# Altium PCB DB_Memory.PcbDoc (part 1 of 2)
Units mm, origin at the board's own origin, x right, y up, seen from the top; angles counter-clockwise.
Board outline 63.5 x 43.5 mm, 2 copper layers (Top Layer, Bottom Layer), stack 1.671 mm thick; 45 components, 30 nets, 135 pads, 49 vias.
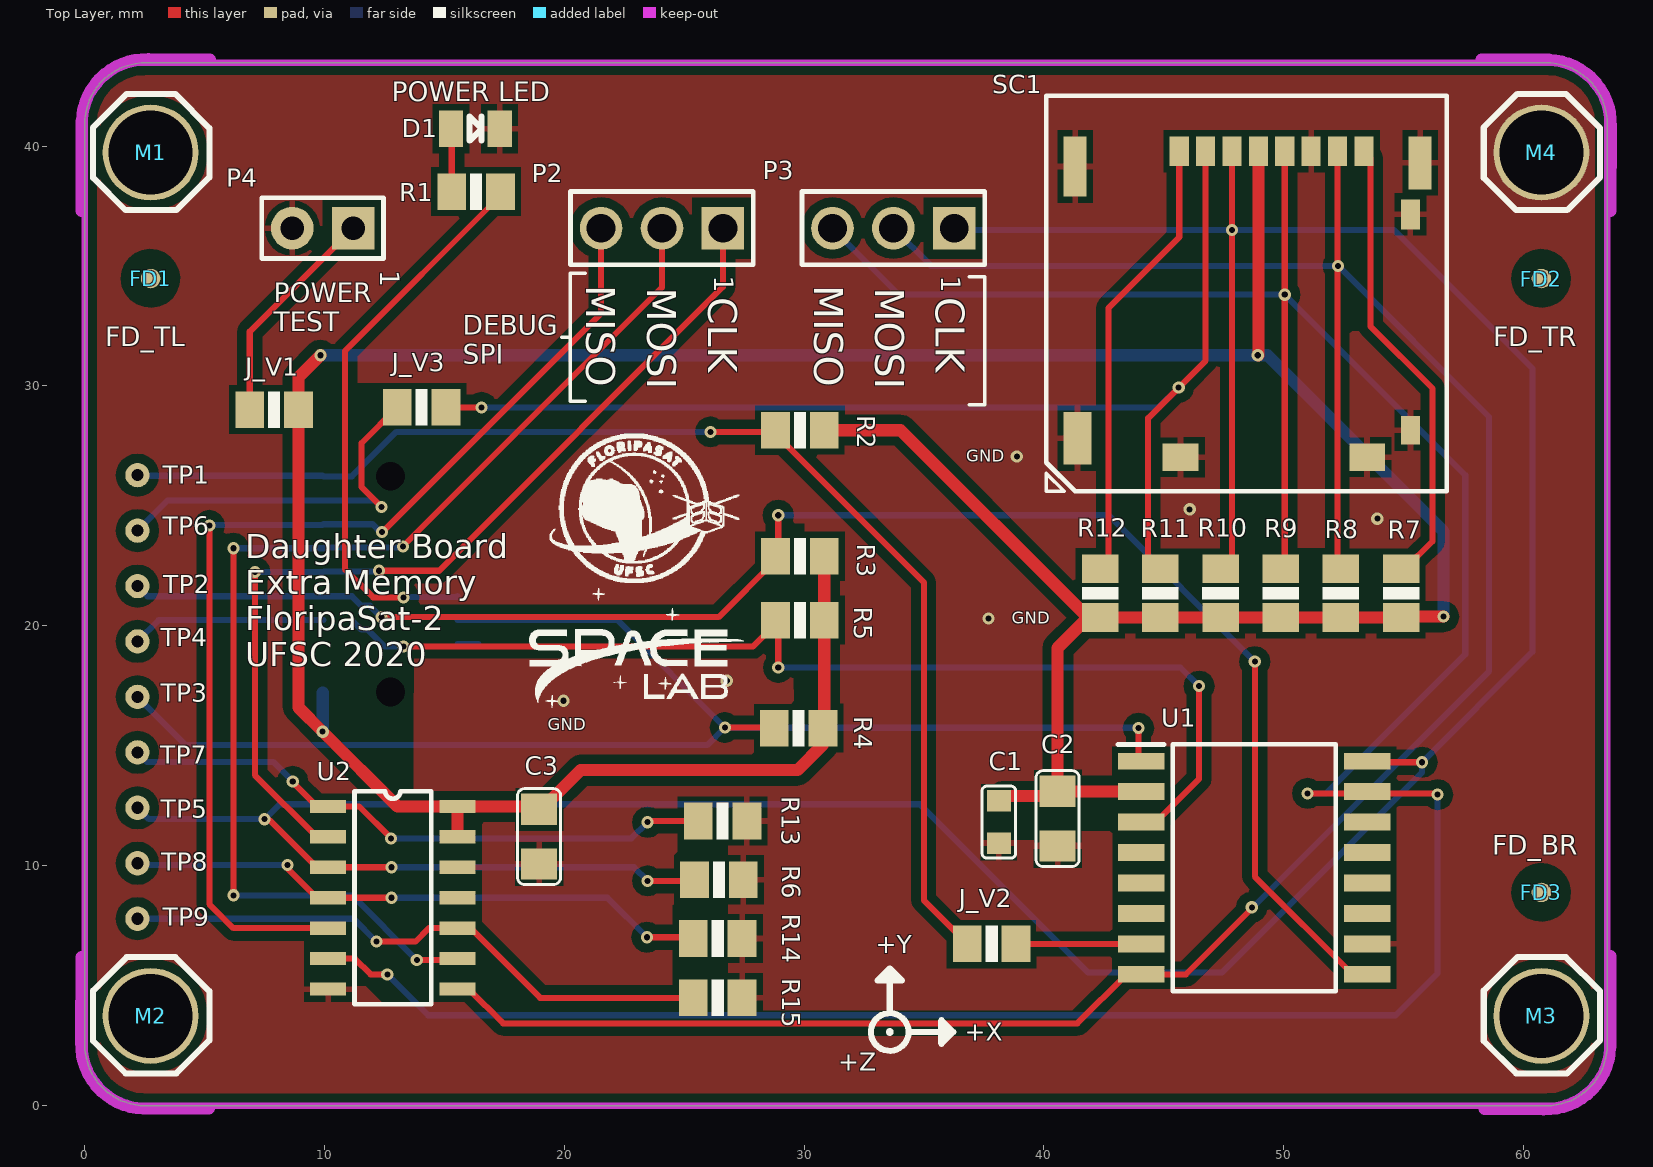
[diagram p0: Top Layer view]
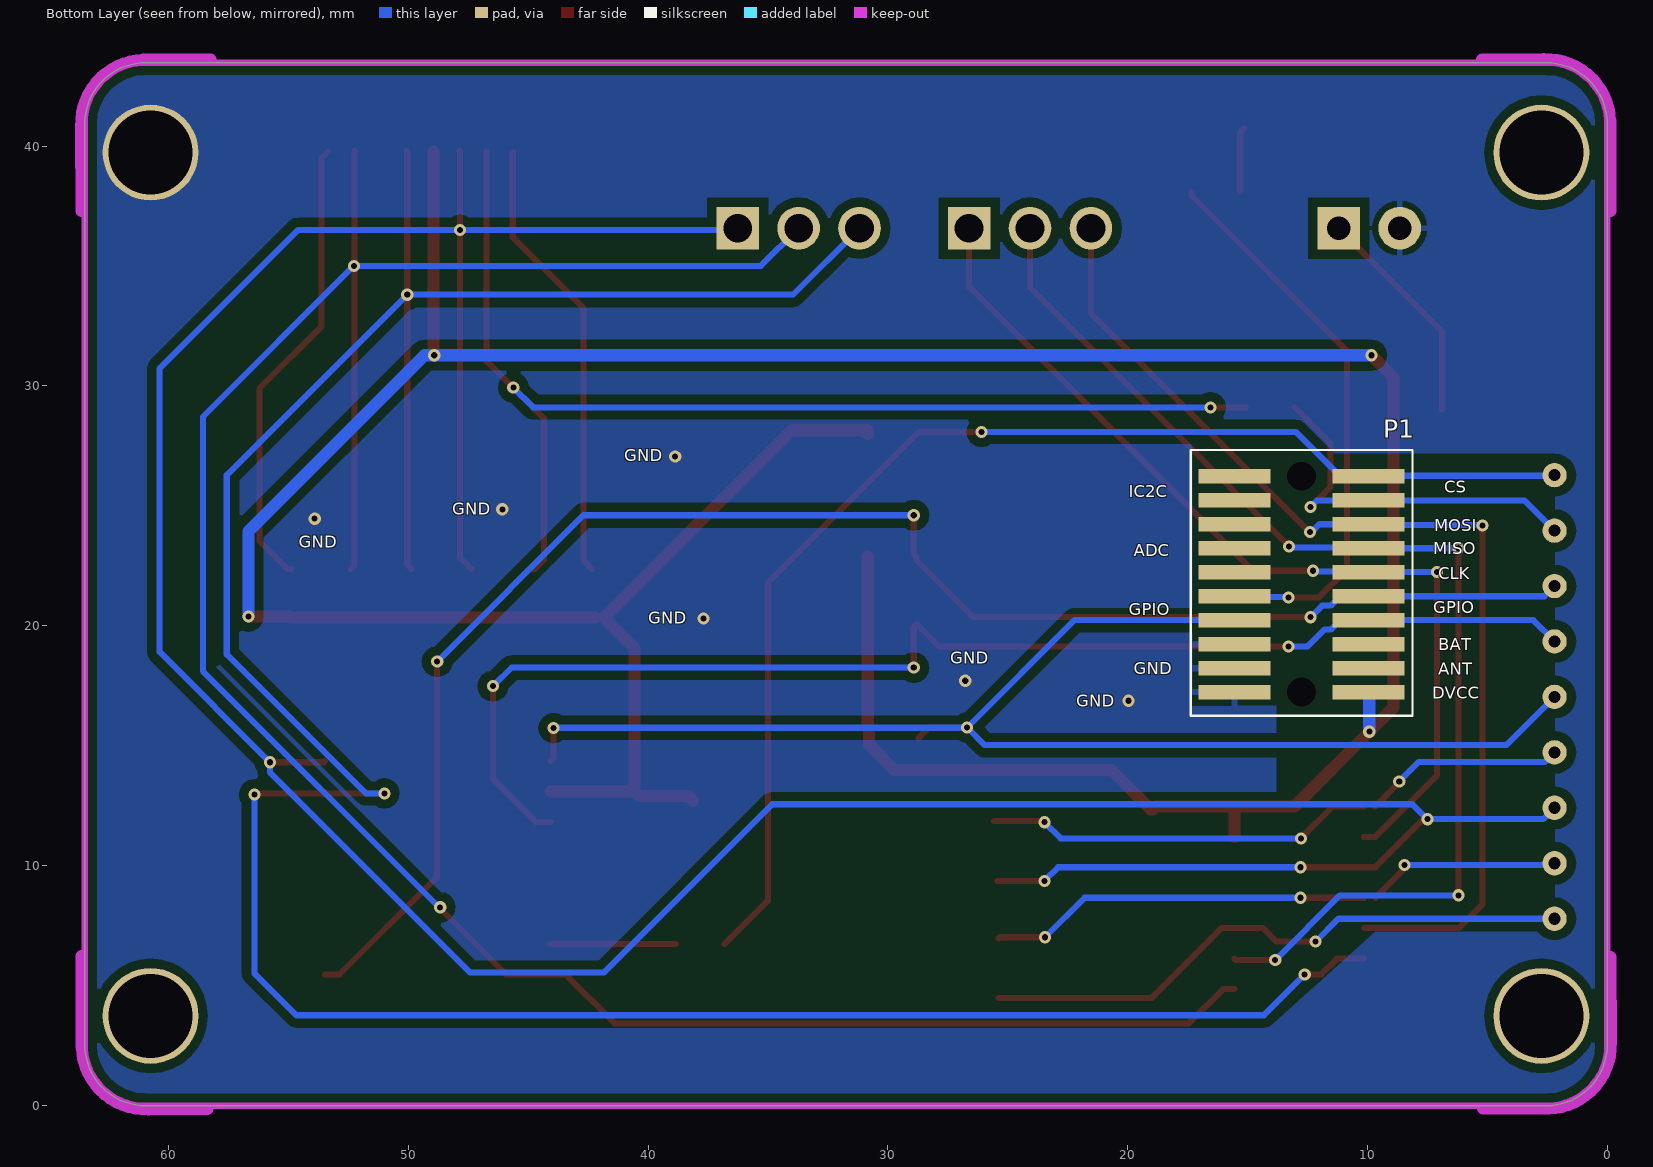
[diagram p1: Bottom Layer view, seen from below]
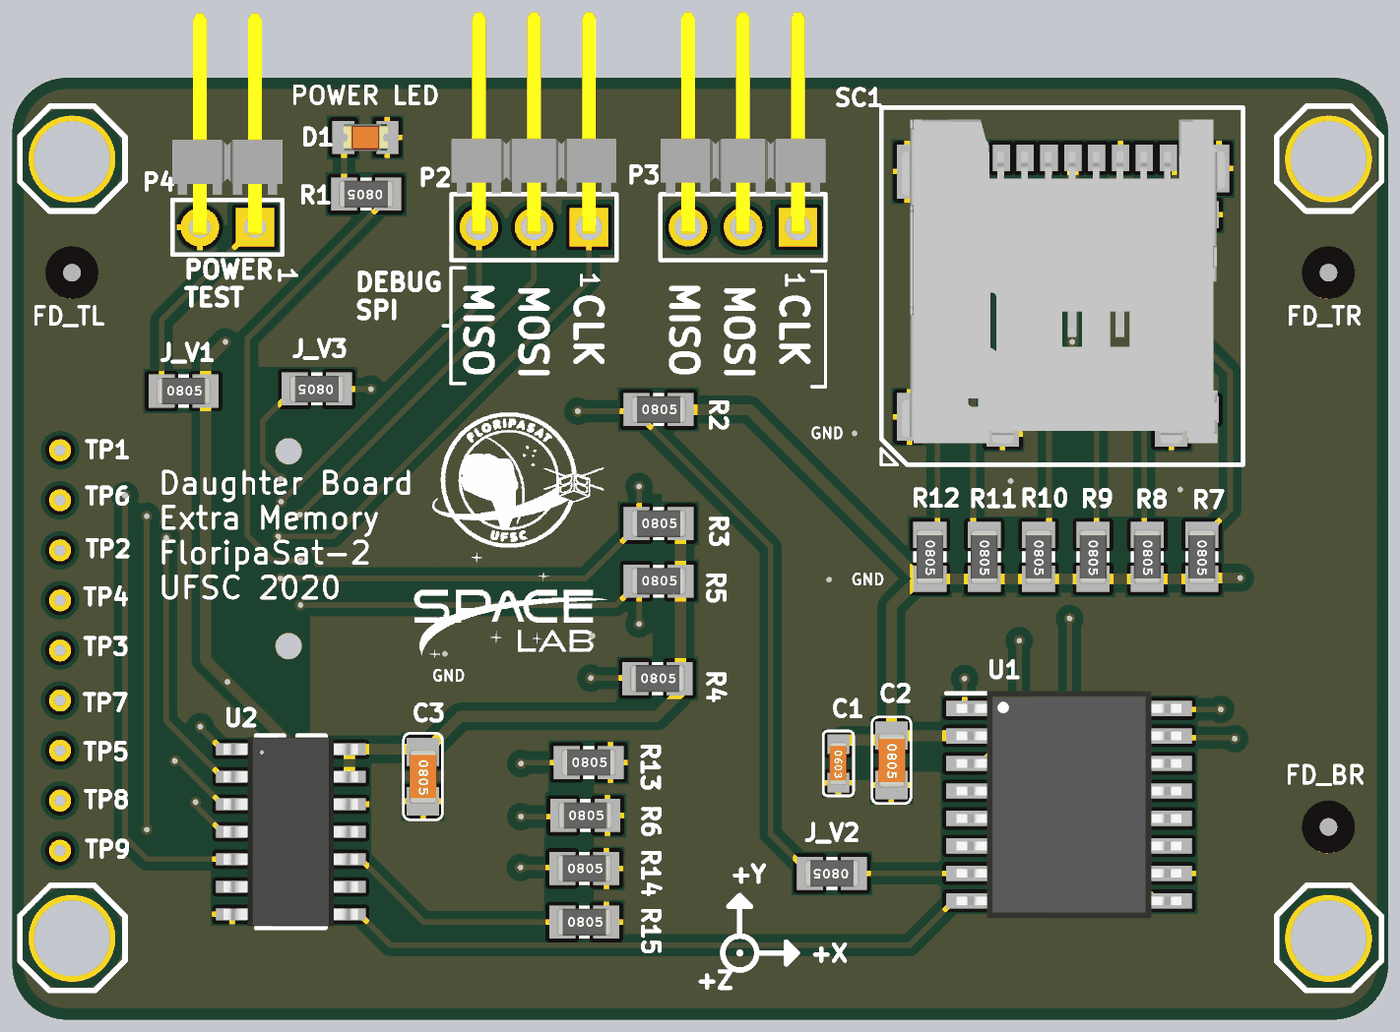
[diagram p2: 3D render of the assembled board from above, using the file's embedded part models]

## Layer stack, top to bottom
Top Solder: solder mask 0.0102, Solder Resist, Dk 3.5
Top Layer: signal copper 0.0356
Dielectric 1: dielectric 1.6, FR-4, Dk 4.8
Bottom Layer: signal copper 0.0356
Bottom Solder: solder mask 0.0102, Solder Resist, Dk 3.5

## Board outline
2.54,-0.025 cw(c2.54,2.515) 0,2.515 0,2.775 0,40.825 0,40.935 cw(c2.54,40.935) 2.54,43.475 2.65,43.475 60.7,43.475 60.96,43.475 cw(c60.96,40.935) 63.5,40.935 63.5,40.675 63.5,2.775 63.5,2.515 cw(c60.96,2.515) 60.96,-0.025

## Design rules (kind name [scope] priority, off if disabled: settings)
Clearance Clearance_1 [(ObjectKind = 'Pad') And (AsMM(X1) = 60.75) And (AsMM(Y1) = 39.75)] p1: gap=0.254 ignorepadtopadclearanceinfootprint=FALSE except(0: Arc-Hole Track-Hole SMDPad-Hole THPad-Hole Via-Hole Fill-Hole Poly-Hole Region-Hole Text-Hole)
Clearance Clearance_6 [InNet('GND')] p2: gap=0.381 ignorepadtopadclearanceinfootprint=FALSE except(0: Arc-Hole Track-Hole SMDPad-Hole THPad-Hole Via-Hole Fill-Hole Poly-Hole Region-Hole Text-Hole; 0.152: THPad-THPad; 0.178: Arc-SMDPad Arc-THPad Track-SMDPad Track-THPad SMDPad-SMDPad; 0.254: SMDPad-Fill SMDPad-Poly SMDPad-Region; 0.508: Arc-Arc Arc-Track Arc-Text Track-Track Track-Text SMDPad-Text Fill-Fill Fill-Poly Fill-Region Fill-Text Poly-Poly Poly-Region Poly-Text Region-Region Region-Text Text-Text)
Clearance [All] p3: gap=0.178 ignorepadtopadclearanceinfootprint=FALSE except(0: Arc-Hole Track-Hole SMDPad-Hole THPad-Hole Via-Hole Fill-Hole Poly-Hole Region-Hole Text-Hole)
DiffPairsRouting DiffPairsRouting_1 [InDifferentialPair('XT2')] p1: maxlimit=0.254 minlimit=0.254 mostfreqgap=0.254 toplayer_minwidth=0.254 toplayer_maxwidth=0.254 toplayer_prefwidth=0.254 bottomlayer_minwidth=0.254 bottomlayer_maxwidth=0.254 bottomlayer_prefwidth=0.254 maxuncoupledlength=12.7
DiffPairsRouting [All] p2: maxlimit=0.152 minlimit=0.152 mostfreqgap=0.152 toplayer_minwidth=0.457 toplayer_maxwidth=0.457 toplayer_prefwidth=0.457 bottomlayer_minwidth=0.457 bottomlayer_maxwidth=0.457 bottomlayer_prefwidth=0.457 maxuncoupledlength=12.7
HoleSize [All] p1: absolutevalues=TRUE maxlimit=5.08 minlimit=0.025 maxpercent=80.000 minpercent=20.000
MinimumSolderMaskSliver [All] p1: minsoldermaskwidth=0
PlaneConnect [InNetClass('power')] p1: planeconnectstyle=Direct reliefexpansion=0.508 reliefentries=4 reliefconductorwidth=0.254 reliefairgap=0.254
PlaneConnect PlaneConnect_1 [All] p2: planeconnectstyle=Relief reliefexpansion=0.508 reliefentries=4 reliefconductorwidth=0.254 reliefairgap=0.254
PolygonConnect PolygonConnect_GDN_Mechole [(ObjectKind = 'Pad') And (AsMM(X1) = 60.75) And (AsMM(Y1) = 39.725) And (Component = 'M4')] p1: connectstyle=Direct reliefconductorwidth=0.254 reliefentries=4 polygonreliefangle="90 Angle" airgapwidth=0.254
PolygonConnect PolygonConnect_GND_pads [(ObjectKind = 'Pad') And (Net = 'GND')] p2: connectstyle=Relief reliefconductorwidth=0.254 reliefentries=4 polygonreliefangle="90 Angle" airgapwidth=0.254
RoutingVias [All] p1: holewidth=0.254 width=0.508 viastyle="Through Hole" minholewidth=0.127 minwidth=0.254 maxholewidth=0.254 maxwidth=0.635
SilkToSilkClearance [All] p1: silktosilkclearance=0.127
SilkToSolderMaskClearance [IsPad] p1: minsilkscreentomaskgap=0 clearancetoexposedcopper=TRUE
SolderMaskExpansion [All] p1: expansion=0.178
Width Width_Power [InNetClass('Power')] p1: maxlimit=0.762 minlimit=0.508 preferedwidth=0.508
Width [All] p2: maxlimit=1.778 minlimit=0.127 preferedwidth=0.254
24 further rules are at their usual default settings.

## Classes and differential pairs
component class 0_Architecture: FD1 FD2 FD3 M1 M2 M3 M4
component class U_3_Communication_Buffers: C3 R13 R14 R15 TP7 TP8 TP9 U2
component class U_2_Non_Volatile_Memories: C1 C2 J_V2 J_V3 R2 R3 R4 R5 R6 R7 R8 R9 R10 R11 R12 SC1 TP1 TP2 TP3 TP4 TP5 TP6 U1
component class "OBDH 2.0 to DB_Memory interface connector": D1 J_V1 P1 P2 P3 P4 R1

## Components (designator, comment, footprint, x,y, rotation, side; value= is the part's Value field where it differs from the comment)
C1 "100nF/50V" C0603_MD 38.125,11.805 r270 top
C2 "4.7uF/25V" C0805_MD 40.575,11.95 r270 top
C3 "0.1uF/25V" C0805_MD 18.95,11.2 r270 top
D1 "Orange" 0805-LED 16.3,40.725 r0 top
FD1 "Fiducial" "FIDUCIAL 1.3MM" 2.75,34.475 r0 top
FD2 "Fiducial" "FIDUCIAL 1.3MM" 60.75,34.475 r0 top
FD3 "Fiducial" "FIDUCIAL 1.3MM" 60.75,8.872 r0 top
J_V1 "0R" 0805 7.899,29.007 r0 top
J_V2 "0R" 0805 37.825,6.725 r180 top
J_V3 "0R" 0805 14.05,29.1 r180 top
M1 "DB Mechanical Hole" "DB MECHANICAL HOLE" 2.75,39.725 r0 top
M2 "DB Mechanical Hole" "DB MECHANICAL HOLE" 2.75,3.725 r0 top
M3 "DB Mechanical Hole" "DB MECHANICAL HOLE" 60.75,3.725 r0 top
M4 "DB Mechanical Hole" "DB MECHANICAL HOLE" 60.75,39.725 r0 top
P1 "FSI-110-03-G-D-AD" "MATING FSI-110-03-G-D-AD" 12.75,21.725 r0 top
P2 "HEADER 3x" HEADER1X3 24.075,36.575 r270 top
P3 "HEADER 3x" HEADER1X3 33.725,36.575 r270 top
P4 "HEADER 2x" "HEADER 1X2" 9.925,36.575 r0 top
R1 "330R" 0805 16.325,38.1 r180 top
R2 "10k" 0805 29.825,28.15 r0 top
R3 "10k" 0805 29.825,22.887 r0 top
R4 "10k" 0805 29.775,15.725 r0 top
R5 "10k" 0805 29.825,20.231 r0 top
R6 "100k" 0805 26.45,9.4 r0 top
R7 "10k" 0805 54.9,21.35 r270 top
R8 "10k" 0805 52.39,21.35 r270 top
R9 "10k" 0805 49.88,21.35 r270 top
R10 "10k" 0805 47.37,21.35 r270 top
R11 "10k" 0805 44.86,21.35 r270 top
R12 "10k" 0805 42.35,21.35 r270 top
R13 "10k" 0805 26.6,11.85 r0 top
R14 "10k" 0805 26.4,6.95 r0 top
R15 "10k" 0805 26.4,4.475 r0 top
SC1 "MicroSD Card Connector" USD_CARD 48.5,33.4 r180 top
TP1 "TEST_POINT_2" TEST_POINT_2 2.2,26.275 r90 top
TP2 "TEST_POINT_2" TEST_POINT_2 2.2,21.65 r90 top
TP3 "TEST_POINT_2" TEST_POINT_2 2.2,17.025 r90 top
TP4 "TEST_POINT_2" TEST_POINT_2 2.2,19.337 r90 top
TP5 "TEST_POINT_2" TEST_POINT_2 2.2,12.4 r90 top
TP6 "TEST_POINT_2" TEST_POINT_2 2.2,23.962 r90 top
TP7 "TEST_POINT_2" TEST_POINT_2 2.2,14.712 r180 top
TP8 "TEST_POINT_2" TEST_POINT_2 2.2,10.087 r180 top
TP9 "TEST_POINT_2" TEST_POINT_2 2.2,7.775 r180 top
U1 "MT25QL01GBBB8ESF-0SIT" SOIC127P1032X265-16N 48.775,9.9 r0 top
U2 "SN74LVC125APWR" SN74LVC125APWR 12.85,8.65 r0 top

## Footprints (in the part's own frame and the unit in brackets; to place one, negate y for a bottom-side part, rotate by r counter-clockwise, add the part's x,y. Pads: shape width x height; smd on the part's side, far side on the other; paste and mask are expansions set on the pad)
0805 [mil]
  rect 47.24x60 smd: 1(-40,0) 2(40,0)
  silkscreen extent -10,-30 10,30, body extent -49,-24 49,25, height 31
0805-LED [mil]
  rect 40x60 smd: 1(-40.35,0) 2(39.65,0)
  silkscreen extent -10,-20 10,20, body extent -40,-25 40,25, height 43
C0603_MD [mm] "Chip Capacitor, Body 1.6x0.8mm, IPC Medium Density"
  rect 0.9x1 smd: 1(-0.889,0) 2(0.889,0)
  silkscreen extent -1.5,-0.7 1.5,0.7, body extent -1,-0.41 1,0.38, height 0.79
C0805_MD [mm] "Chip Capacitor, Body 2.0x1.3mm, IPC Medium Density"
  rect 1.3x1.5 smd: 1(-1.143,0) 2(1.143,0)
  silkscreen extent -2,-0.9 2,0.9, body extent -1.25,-0.61 1.25,0.64, height 0.79
"DB MECHANICAL HOLE" [mm]
  round 4 hole 3.5 mask+0: 0(0,0)
"FIDUCIAL 1.3MM" [mil]
  round 32 smd: 1(0,0)
  Top Layer pour cut-out: -48.23,-6.89 -45.31,17.58 -30.69,37.43 -8.18,47.47 16.35,45.09 36.52,30.91 47.05,8.63 45.22,-15.95 31.5,-36.42 31.5,-36.42 8.41,-46.85 -16.81,-44.45 -37.51,-29.85 -48.23,-6.89
  Top Layer pour cut-out: 0.19,48.23
HEADER1X3 [mil]
  rect 70x70 hole 47.24: 1(0,100)
  round 70 hole 47.24: 2(0,0) 3(0,-100)
  silkscreen extent -60,-150 60,150, body extent -391,-150 11,150, height 120
"HEADER 1X2" [mil]
  rect 70x70 hole 39: 1(50,0)
  round 70 hole 39: 2(-50,0)
  silkscreen extent -100,-50 100,50, body extent -100,-13 100,389, height 120
"MATING FSI-110-03-G-D-AD" [mm]
  rect 3x0.61 smd far side: 1(-2.8,-4.5) 2(2.8,-4.5) 3(-2.8,-3.5) 4(2.8,-3.5) 5(-2.8,-2.5) 6(2.8,-2.5) 7(-2.8,-1.5) 8(2.8,-1.5) 9(-2.8,-0.5) 10(2.8,-0.5) 11(-2.8,0.5) 12(2.8,0.5) 13(-2.8,1.5) 14(2.8,1.5) 15(-2.8,2.5) 16(2.8,2.5) 17(-2.8,3.5) 18(2.8,3.5) 19(-2.8,4.5) 20(2.8,4.5)
  round 0 hole 1.2: AT(0,-4.5) AT(0,4.5)
SN74LVC125APWR [mm]
  rect 1.5x0.55 smd: 1(-2.7,3.81) 2(-2.7,2.54) 3(-2.7,1.27) 4(-2.7,0) 5(-2.7,-1.27) 6(-2.7,-2.54) 7(-2.7,-3.81) 8(2.7,-3.81) 9(2.7,-2.54) 10(2.7,-1.27) 11(2.7,0) 12(2.7,1.27) 13(2.7,2.54) 14(2.7,3.81)
  silkscreen extent -1.6,-4.44 1.6,4.44, body extent -3.1,-4.37 3.1,4.37, height 1.76
SOIC127P1032X265-16N [mm]
  rect 1.925x0.7 smd: 1(-4.712,4.445) 2(-4.712,3.175) 3(-4.712,1.905) 4(-4.712,0.635) 5(-4.712,-0.635) 6(-4.712,-1.905) 7(-4.712,-3.175) 8(-4.712,-4.445) 9(4.712,-4.445) 10(4.712,-3.175) 11(4.712,-1.905) 12(4.712,-0.635) 13(4.712,0.635) 14(4.712,1.905) 15(4.712,3.175) 16(4.712,4.445)
  silkscreen extent -5.68,-5.15 3.4,5.15, body extent -5.19,-5.25 5.19,5.25, height 2.8
TEST_POINT_2 [mil]
  round 40 hole 20: 1(0,0)
USD_CARD [mm]
  rect 0.8x1.24 smd: 1(2.85,-6.378) 2(1.75,-6.378) 3(0.65,-6.378) 4(-0.45,-6.378) 5(-1.55,-6.378) 6(-2.65,-6.378) 7(-3.75,-6.378) 8(-4.85,-6.378) 10(-6.79,-3.748)
  rect 0.95x2.2 smd: 10(-7.195,-5.898)
  rect 0.8x1.2 smd: 10(-6.79,5.252)
  rect 1.5x1.15 smd: 10(-4.99,6.378) 10(2.79,6.378)
  rect 1.15x2.2 smd: 10(7.095,5.582)
  rect 0.95x2.5 smd: 10(7.195,-5.748)
  silkscreen extent -8.3,-8.7 8.39,7.8, body extent -7.49,-8.16 7.45,6.79, height 1.43

## Part data
C1: library part Cap_Cer_X7R_100nF_50V_0603, "CAP CER 100nF 50V 0603 10%", Capacitance=100pF, Case/Package=0201, Case Code (Metric)=0603, Dielectric=X7R, Manufacturer=Yageo, Manufacturer Part Number=CC0201KRX7R9BB101, Max Operating Temperature=125°C, Min Operating Temperature=-55°C, Package Quantity=1, Partnumber=C0603C104K5RAC3121, Supplier Part Number 1=311-1401-1-ND, Tolerance=10%, Voltage Rating=50V, Case Code (Imperial)=0201, ComponentLink1Description=https://www.digikey.com/product-detail/en/yageo/CC0201KRX7R9BB101/311-1401-1-ND/2833707, ComponentLink1URL=https://www.digikey.com/product-detail/en/yageo/CC0201KRX7R9BB101/311-1401-1-ND/2833707, ComponentLink2Description=https://br.mouser.com/ProductDetail/Yageo/CC0201KRX7R9BB101?qs=%2Fha2pyFaduiYipKOFrxfqt3%252B9aGSfhofiweIoBBppi5CkwQHqUahpQ%3D%3D, ComponentLink2URL=https://br.mouser.com/ProductDetail/Yageo/CC0201KRX7R9BB101?qs=%2Fha2pyFaduiYipKOFrxfqt3%252B9aGSfhofiweIoBBppi5CkwQHqUahpQ%3D%3D, ComponentLink3Description=http://www.yageo.com/documents/recent/UPY-GPHC_X7R_6.3V-to-50V_18.pdf?src-supplier=Digi-Key, ComponentLink3URL=http://www.yageo.com/documents/recent/UPY-GPHC_X7R_6.3V-to-50V_18.pdf?src-supplier=Digi-Key, ComponentLink4Description=http://www.yageo.com/documents/recent/UPY-GPHC_X7R_6.3V-to-50V_8.pdf?src-supplier=Avnet+Europe, ComponentLink4URL=http://www.yageo.com/documents/recent/UPY-GPHC_X7R_6.3V-to-50V_8.pdf?src-supplier=Avnet+Europe, ComponentLink5Description=http://www.yageo.com/documents/recent/UPY-GPHC_X7R_6.3V-to-50V_8.pdf?src-supplier=Avnet, ComponentLink5URL=http://www.yageo.com/documents/recent/UPY-GPHC_X7R_6.3V-to-50V_8.pdf?src-supplier=Avnet, ComponentLink6Description=http://www.mouser.com/ds/2/447/Yageo_UPY-GP_NP0_16V-to-50V_9-358835.pdf?src-supplier=Mouser, ComponentLink6URL=http://www.mouser.com/ds/2/447/Yageo_UPY-GP_NP0_16V-to-50V_9-358835.pdf?src-supplier=Mouser, Composition=Ceramic, Depth=0.3mm, Halogen Free="Halogen Free", Height=0.3mm, Lead Free="Lead Free", Length=0.6mm, Mount="Surface Mount", NCM=8532.24.10, Packaging="Tape and Reel", Pricing 1="1=0.1, 10=0.017, 100=0.0078, 500=0.00554, 1000=0.00436, 2500=0.00396, 5000=0.00364 (USD)", Pricing 2="1=0.1, 10=0.024, 100=0.011, 1000=0.009, 2500=0.006, 10000=0.006 (USD)", Radiation Hardening=No, Stock 1=203642, Stock 2=51204, Supplier 1=Digi-Key, Supplier 2=Mouser, Supplier Part Number 2=603-CC201KRX7R9BB101, Termination=SMD/SMT, Thickness=0.013inch, Voltage Rating (DC)=50V, Weight=6E-06oz, Width=0.012inch
C2: library part Cap_Cer_X7R_4.7uF_25V_0805, "CAP CER 4.7UF 25V 10% X7R 0805", Capacitance=4.7uF, Case/Package=0805, Case Code (Metric)=2012, Dielectric=X7R, Manufacturer="Taiyo Yuden", Manufacturer Part Number=TMK212AB7475KG-T, Max Operating Temperature=125°C, Min Operating Temperature=-55°C, Package Quantity=1, Partnumber=C0805C475K3RACAUTO, Supplier Part Number 1=587-2990-6-ND, Tolerance=10%, Voltage Rating=25V, Case Code (Imperial)=0805, ComponentLink1Description=https://www.digikey.com/product-detail/en/taiyo-yuden/TMK212AB7475KG-T/587-2990-2-ND/2714168, ComponentLink1URL=https://www.digikey.com/product-detail/en/taiyo-yuden/TMK212AB7475KG-T/587-2990-2-ND/2714168, ComponentLink2Description=https://br.mouser.com/ProductDetail/Taiyo-Yuden/TMK212AB7475KG-T?qs=%2Fha2pyFaduhOmvqoBXaf2AOtUPA8upoo0e72F1hCYb1lacT8UkHI0g%3D%3D, ComponentLink2URL=https://br.mouser.com/ProductDetail/Taiyo-Yuden/TMK212AB7475KG-T?qs=%2Fha2pyFaduhOmvqoBXaf2AOtUPA8upoo0e72F1hCYb1lacT8UkHI0g%3D%3D, ComponentLink3Description=https://www.yuden.co.jp/productdata/catalog/mlcc_all_e.pdf?src-supplier=Digi-Key, ComponentLink3URL=https://www.yuden.co.jp/productdata/catalog/mlcc_all_e.pdf?src-supplier=Digi-Key, ComponentLink4Description=http://www.yuden.co.jp/ut/product/category/capacitor/TMK212AB7475KG-T.pdf?src-supplier=Avnet, ComponentLink4URL=http://www.yuden.co.jp/ut/product/category/capacitor/TMK212AB7475KG-T.pdf?src-supplier=Avnet, ComponentLink5Description=http://www.farnell.com/datasheets/1481447.pdf?src-supplier=Element14, ComponentLink5URL=http://www.farnell.com/datasheets/1481447.pdf?src-supplier=Element14, ComponentLink6Description=http://www.onlinecomponents.com/productFiles/mf-TAI/461tmk212ab7475kg-t.pdf?src-supplier=Onlinecomponents.com, ComponentLink6URL=http://www.onlinecomponents.com/productFiles/mf-TAI/461tmk212ab7475kg-t.pdf?src-supplier=Onlinecomponents.com, Composition=Ceramic, Depth=1.25mm, Height=1.25mm, Length=2mm, Mount="Surface Mount", NCM=8532.24.10, Number of Pins=2, Packaging="Tape and Reel", Pricing 1="1=0.35, 10=0.243, 100=0.1376, 500=0.09716, 1000=0.08501 (USD)", Pricing 2="1=0.27, 10=0.124, 100=0.083, 500=0.074, 1000=0.065, 3000=0.054 (USD)", Radiation Hardening=No, REACH SVHC=Unknown, Stock 1=1594936, Stock 2=326053, Supplier 1=Digi-Key, Supplier 2=Mouser, Supplier Part Number 2=963-TMK212AB7475KG-T, Termination=SMD/SMT, Thickness=0.053inch, Voltage Rating (DC)=25V, Width=0.049inch
C3: library part Cap_Cer_X7R_0.1uF_25V_0805, "CAP CER 0.1UF 25V 10% X7R 0805", Capacitance=100nF, Case/Package=0805, Case Code (Metric)=2012, Dielectric=X7R, Insulation Resistance=100GR, Manufacturer=Yageo, Manufacturer Part Number=CC0805KRX7R8BB104, Max Operating Temperature=125°C, Min Operating Temperature=-55°C, Package Quantity=1, Supplier Part Number 1=311-1141-1-ND, Tolerance=10%, Voltage Rating=25V, Case Code (Imperial)=0805, ComponentLink1Description=http://www.yageo.com/documents/recent/UPY-GPHC_X7R_6.3V-to-50V_18.pdf?src-supplier=Digi-Key, ComponentLink1URL=http://www.yageo.com/documents/recent/UPY-GPHC_X7R_6.3V-to-50V_18.pdf?src-supplier=Digi-Key, ComponentLink2Description=http://www.farnell.com/datasheets/1489800.pdf?src-supplier=Element14, ComponentLink2URL=http://www.farnell.com/datasheets/1489800.pdf?src-supplier=Element14, ComponentLink3Description=http://www.yageo.com/documents/recent/UPY-GPHC_X7R_6.3V-to-50V_18.pdf?src-supplier=Digi-Key, ComponentLink3URL=http://www.yageo.com/documents/recent/UPY-GPHC_X7R_6.3V-to-50V_18.pdf?src-supplier=Digi-Key, ComponentLink4Description=http://www.farnell.com/datasheets/1489800.pdf?src-supplier=Element14, ComponentLink4URL=http://www.farnell.com/datasheets/1489800.pdf?src-supplier=Element14, ComponentLink5Description=http://www.farnell.com/datasheets/1850775.pdf?src-supplier=Element14, ComponentLink5URL=http://www.farnell.com/datasheets/1850775.pdf?src-supplier=Element14, ComponentLink6Description=https://www.verical.com/server-webapp/html/getDatasheet?partID=330244&src-supplier=Verical, ComponentLink6URL=https://www.verical.com/server-webapp/html/getDatasheet?partID=330244&src-supplier=Verical, ComponentLink7Description=http://www.yageo.com/documents/recent/UPY-GPHC_X7R_6.3V-to-50V_8.pdf?src-supplier=Avnet+Europe, ComponentLink7URL=http://www.yageo.com/documents/recent/UPY-GPHC_X7R_6.3V-to-50V_8.pdf?src-supplier=Avnet+Europe, ComponentLink8Description=http://www.farnell.com/datasheets/1784427.pdf?src-supplier=Element14, ComponentLink8URL=http://www.farnell.com/datasheets/1784427.pdf?src-supplier=Element14, ComponentLink9Description=http://www.farnell.com/datasheets/70765.pdf?src-supplier=Element14, ComponentLink9URL=http://www.farnell.com/datasheets/70765.pdf?src-supplier=Element14, Composition=Ceramic, Depth=1.25mm, Halogen Free="Halogen Free", Height=0.85mm, Lead Free="Lead Free", Length=2mm, Material=Ceramic, Mount="Surface Mount", NCM=8532.24.10, Number of Pins=2, Packaging="Tape and Reel", Partnumber=CC0805KRX7R8BB104, Pricing 1="1=0.14, 10=0.097, 100=0.0458, 500=0.0321, 1000=0.02658 (USD)", Pricing 2="1=0.11, 10=0.08, 100=0.03, 1000=0.025, 4000=0.019, 8000=0.018, 24000=0.015, 48000=0.014, 100000=0.013 (USD)", Radiation Hardening=No, REACH SVHC="No SVHC", Stock 1=243958, Stock 2=131050, Supplier 1=Digi-Key, Supplier 2=Mouser, Supplier Part Number 2=603-CC805KRX7R8BB104, Termination=SMD/SMT, Thickness=0.033inch, Voltage Rating (DC)=25V, Width=0.049inch
D1: library part LED/O_0802, "SMD Orange LED", Case/Package=0805, Case Code (Metric)=2012, Forward Current=30mA, Forward Voltage=2V, Lens Color=Colorless, Manufacturer="Vishay Lite-On", Manufacturer Part Number=LTST-C170KFKT, Max Operating Temperature=85°C, Min Operating Temperature=-55°C, Package Quantity=1, Power Dissipation=75mW, Reverse Voltage=5V, Supplier Part Number 1=160-1413-1-ND, Test Current=20mA, Case Code (Imperial)=0805, Color=Orange, ComponentLink1Description=https://www.digikey.com/product-detail/en/lite-on-inc/LTST-C170KFKT/160-1413-1-ND/386774, ComponentLink1URL=https://www.digikey.com/product-detail/en/lite-on-inc/LTST-C170KFKT/160-1413-1-ND/386774, ComponentLink2Description=https://br.mouser.com/ProductDetail/Lite-On/LTST-C170KFKT?qs=%2Fha2pyFadugHsX7bdQzWjMrioqtf8F%2FEFUVxYkqdVx%252BrRWuVMVludQ%3D%3D, ComponentLink2URL=https://br.mouser.com/ProductDetail/Lite-On/LTST-C170KFKT?qs=%2Fha2pyFadugHsX7bdQzWjMrioqtf8F%2FEFUVxYkqdVx%252BrRWuVMVludQ%3D%3D, ComponentLink3Description=https://www.verical.com/server-webapp/html/getDatasheet?partID=158266&src-supplier=Verical, ComponentLink3URL=https://www.verical.com/server-webapp/html/getDatasheet?partID=158266&src-supplier=Verical, ComponentLink4Description=http://optoelectronics.liteon.com/upload/download/DS-22-99-0185/LTST-C170KFKT.pdf?src-supplier=Digi-Key, ComponentLink4URL=http://optoelectronics.liteon.com/upload/download/DS-22-99-0185/LTST-C170KFKT.pdf?src-supplier=Digi-Key, ComponentLink5Description=http://www1.futureelectronics.com/doc/LITE-ON/LTST-C170KFKT.pdf?src-supplier=Future+Electronics, ComponentLink5URL=http://www1.futureelectronics.com/doc/LITE-ON/LTST-C170KFKT.pdf?src-supplier=Future+Electronics, ComponentLink6Description=http://www.mouser.com/ds/2/239/Lite-On-LTST-C170KFKT-187690.pdf?src-supplier=Mouser, ComponentLink6URL=http://www.mouser.com/ds/2/239/Lite-On-LTST-C170KFKT-187690.pdf?src-supplier=Mouser, Depth=1.6mm, Dominant Wavelength=605nm, Height=1.1mm, Illumination Color=Orange, Lead Free="Lead Free", Length=3.2mm, Lens Style=Diffused,Colorless,Rectangular,Clear, Lens Transparency=Clear, Luminous Intensity=60mcd, Mount="Surface Mount", NCM=8541.40.21, Number of Elements=1, Number of LEDs=1, Number of Pins=2, Packaging="Tape and Reel", Partnumber=LTST-C170KFKT, Power Rating=75mW, Pricing 1="1=0.28, 10=0.204, 100=0.0968, 500=0.0645, 1000=0.05053 (USD)", Pricing 2="1=0.28, 10=0.15, 100=0.07, 1000=0.051, 3000=0.043, 9000=0.039, 24000=0.035, 45000=0.032, 99000=0.03 (USD)", Radiation Hardening=No, Stock 1=5261, Stock 2=0, Supplier 1=Digi-Key, Supplier 2=Mouser, Supplier Part Number 2=859-LTST-C170KFKT, Viewing Angle=130°, Wavelength=611nm, Width=1.25mm
FD1 FD2 FD3: "Fiducial for DB board variants"
J_V1 J_V2 J_V3: library part RC0805JR-070RL, "RES 0R OHM 1/8W JUMPER 0805", Case/Package=0805, Case Code (Metric)=2012, Manufacturer=Yageo, Max Operating Temperature=155°C, Min Operating Temperature=-55°C, Partnumber=CRCW08050000Z0EA, Power Rating=125mW, Resistance=0mR, Supplier Part Number 1=311-0.0ARCT-ND, Temperature Coefficient=200ppm/°C, Tolerance=5%, Voltage Rating=150V, Case Code (Imperial)=0805, ComponentLink1Description=http://www.farnell.com/datasheets/2167052.pdf?src-supplier=Element14, ComponentLink1URL=http://www.farnell.com/datasheets/2167052.pdf?src-supplier=Element14, ComponentLink2Description=http://documents.rs-components.com/techlib://itc_doclist_GB.htm?stockno=6185129&src-supplier=RSComponents, ComponentLink2URL=http://documents.rs-components.com/techlib://itc_doclist_GB.htm?stockno=6185129&src-supplier=RSComponents, ComponentLink3Description=https://www.verical.com/server-webapp/html/getDatasheet?partID=330685&src-supplier=Verical, ComponentLink3URL=https://www.verical.com/server-webapp/html/getDatasheet?partID=330685&src-supplier=Verical, Composition="Thick Film", Contact Plating=Tin,Matte, Depth=1.25mm, Height=0.5mm, Lead Free="Lead Free", Length=2mm, Manufacturer Part Number=RC0805JR-070RL, Military Standard=Not, NCM=8533.21.20, Number of Pins=2, Packaging="Tape and Reel", Pricing 1="1=0.1, 10=0.035, 25=0.0248, 50=0.019, 100=0.014, 250=0.01072, 500=0.00856, 1000=0.00631 (USD)", Pricing 2="1=0.1, 10=0.005, 100=0.005, 1000=0.005, 5000=0.004, 10000=0.004 (USD)", Radiation Hardening=No, REACH SVHC=Unknown, Stock 1=10579520, Stock 2=658275, Supplier 1=Digi-Key, Supplier 2=Mouser, Supplier Part Number 2=603-RC0805JR-070RL, Termination=SMD/SMT, Voltage Rating (DC)=150V, Width=1.25mm
M1 M2 M3 M4: "Mechanical Hole for DB board variants"
P1: "CONN STACKING 20POS SMD GOLD", Manufacturer=Samtec, Supplier Part Number 1=SAM9412-ND, ComponentLink1Description=https://www.digikey.com/product-detail/en/samtec-inc/FSI-110-03-G-D-AD/SAM9412-ND/6678149, ComponentLink1URL=https://www.digikey.com/product-detail/en/samtec-inc/FSI-110-03-G-D-AD/SAM9412-ND/6678149, ComponentLink2Description=https://br.mouser.com/ProductDetail/Samtec/FSI-110-03-G-D-AD?qs=sGAEpiMZZMvffgRu4KC1RxM6nKwEP14AvPoIU%2FGiIRnIunfAN0MvNQ%3D%3D, ComponentLink2URL=https://br.mouser.com/ProductDetail/Samtec/FSI-110-03-G-D-AD?qs=sGAEpiMZZMvffgRu4KC1RxM6nKwEP14AvPoIU%2FGiIRnIunfAN0MvNQ%3D%3D, ComponentLink3Description=http://www.samtec.com/ftppub/pdf/FSI_03.PDF?src-supplier=Avnet+Europe, ComponentLink3URL=http://www.samtec.com/ftppub/pdf/FSI_03.PDF?src-supplier=Avnet+Europe, Contact Material=Copper, Contact Plating=Gold, Gender=Male, Manufacturer Part Number=FSI-110-03-G-D-AD, Mount="Surface Mount", Number of Contacts=20, Number of Rows=2, Partnumber=FSI-110-03-G-D-AD, Pitch=1mm, Pricing 1="1=6.6, 10=6.325, 25=5.7752, 50=5.5, 100=5.225, 250=4.675, 500=4.4, 1000=3.85, 2500=3.6575 (USD)", Pricing 2="1=6.59, 10=5.5, 100=4.68, 250=4.17, 500=3.84, 1000=3.6 (USD)", Radiation Hardening=No, REACH SVHC="No SVHC", Stock 1=100, Stock 2=50, Supplier 1=Digi-Key, Supplier 2=Mouser, Supplier Part Number 2=200-FSI11003GDAD, Termination=Solder
P2 P3: "Conn Unshrouded Header HDR 3 POS 2.54mm Solder RA Thru-Hole Automotive Bulk", Color=Black, Manufacturer=Samtec, Manufacturer Part Number=TSW-103-08-G-S-RA, Max Current Rating=7.6A, Max Operating Temperature=125°C, Max Voltage Rating (AC)=450V, Min Operating Temperature=-55°C, Package Quantity=1, Supplier Part Number 1=SAM1039-03-ND, ComponentLink1Description=http://www.samtec.com/ftppub/pdf/htsw_th.pdf?src-supplier=Avnet+Europe, ComponentLink1URL=http://www.samtec.com/ftppub/pdf/htsw_th.pdf?src-supplier=Avnet+Europe, ComponentLink2Description=http://www.samtec.com/ftppub/pdf/htsw_th.pdf?src-supplier=Avnet, ComponentLink2URL=http://www.samtec.com/ftppub/pdf/htsw_th.pdf?src-supplier=Avnet, ComponentLink3Description=http://suddendocs.samtec.com/prints/tsw-xxx-xx-x-x-xx-xxx-footprint.pdf?src-supplier=Digi-Key, ComponentLink3URL=http://suddendocs.samtec.com/prints/tsw-xxx-xx-x-x-xx-xxx-footprint.pdf?src-supplier=Digi-Key, ComponentLink4Description=https://www.digikey.com/product-detail/en/samtec-inc/TSW-103-08-G-S-RA/SAM1039-03-ND/1101821, ComponentLink4URL=https://www.digikey.com/product-detail/en/samtec-inc/TSW-103-08-G-S-RA/SAM1039-03-ND/1101821, ComponentLink5Description=https://br.mouser.com/ProductDetail/Samtec/TSW-103-08-G-S-RA?qs=sGAEpiMZZMs%252BGHln7q6pm1g2HIpDMMemHovqpYNR5zQ9xV6Y7S0zpg%3D%3D, ComponentLink5URL=https://br.mouser.com/ProductDetail/Samtec/TSW-103-08-G-S-RA?qs=sGAEpiMZZMs%252BGHln7q6pm1g2HIpDMMemHovqpYNR5zQ9xV6Y7S0zpg%3D%3D, Connector Type="Male Pin", Contact Material=Bronze, Contact Mating Length=0.23inch, Contact Plating=Gold, Depth=9.9mm, Gender=Male, Housing Color=Black, Housing Material=Polyester, Lead Free="Lead Free", Length=7.62mm, Number of Contacts=3, Number of Positions=3, Number of Rows=1, Orientation="Right Angle", Packaging=Bulk, Pitch=2.54mm, Pricing 1="1=0.43, 10=0.403, 25=0.3456, 50=0.2938, 100=0.2822, 250=0.25344, 500=0.24192 (USD)", Pricing 2="1=0.44, 10=0.303, 100=0.249, 1000=0.208, 2500=0.178, 10000=0.16 (USD)", Radiation Hardening=No, REACH SVHC="No SVHC", Stock 1=2099, Stock 2=1859, Supplier 1=Digi-Key, Supplier 2=Mouser, Supplier Part Number 2=200-TSW10308GSRA, Termination=Solder, Width=2.54mm
P4: "Conn Unshrouded Header HDR 2 POS 2.54mm Solder RA Thru-Hole Automotive Bulk", Color=Black, Manufacturer=Samtec, Manufacturer Part Number=TSW-102-08-G-S-RA, Max Current Rating=7.6A, Max Operating Temperature=125°C, Max Voltage Rating (AC)=450V, Min Operating Temperature=-55°C, Package Quantity=1, Supplier Part Number 1=SAM1039-02-ND, ComponentLink1Description=http://www.samtec.com/ftppub/pdf/htsw_th.pdf?src-supplier=Avnet, ComponentLink1URL=http://www.samtec.com/ftppub/pdf/htsw_th.pdf?src-supplier=Avnet, ComponentLink2Description=http://suddendocs.samtec.com/prints/tsw-xxx-xx-x-x-xx-xxx-footprint.pdf?src-supplier=Digi-Key, ComponentLink2URL=http://suddendocs.samtec.com/prints/tsw-xxx-xx-x-x-xx-xxx-footprint.pdf?src-supplier=Digi-Key, ComponentLink3Description=https://www.digikey.com/product-detail/en/samtec-inc/TSW-102-08-G-S-RA/SAM1039-02-ND/1101822, ComponentLink3URL=https://www.digikey.com/product-detail/en/samtec-inc/TSW-102-08-G-S-RA/SAM1039-02-ND/1101822, ComponentLink4Description=https://br.mouser.com/ProductDetail/Samtec/TSW-102-08-G-S-RA?qs=sGAEpiMZZMs%252BGHln7q6pm8Vn94ktop%2FJ1uezLg%252BX1dFCcXJp94NfRw%3D%3D, ComponentLink4URL=https://br.mouser.com/ProductDetail/Samtec/TSW-102-08-G-S-RA?qs=sGAEpiMZZMs%252BGHln7q6pm8Vn94ktop%2FJ1uezLg%252BX1dFCcXJp94NfRw%3D%3D, Connector Type="Male Pin", Contact Material=Bronze, Contact Mating Length=0.23inch, Contact Plating=Gold, Depth=9.9mm, Gender=Male, Housing Color=Black, Housing Material=Polyester, Lead Free="Lead Free", Length=5.08mm, Number of Contacts=2, Number of Positions=2, Number of Rows=1, Orientation="Right Angle", Packaging=Bulk, Pitch=2.54mm, Pricing 1="1=0.28, 10=0.269, 25=0.2304, 50=0.1958, 100=0.1882, 250=0.16896, 500=0.16128 (USD)", Pricing 2="1=0.29, 10=0.203, 100=0.167, 1000=0.14, 2500=0.119, 10000=0.108 (USD)", Radiation Hardening=No, REACH SVHC="No SVHC", Stock 1=681, Stock 2=90, Supplier 1=Digi-Key, Supplier 2=Mouser, Supplier Part Number 2=200-TSW10208GSRA, Termination=Solder, Width=2.54mm
R1: library part R330R_1%_1/4W_0805, "RES 330R OHM 1/4W 1% 0805", Case/Package=0805, Case Code (Metric)=2012, Manufacturer="KOA Speer", Manufacturer Part Number=RK73H2ATTD3300F, Max Operating Temperature=155°C, Min Operating Temperature=-55°C, Package Quantity=5000, Partnumber=RC0805FR-07330RL, Power Rating=125mW, Supplier Part Number 1=2019-RK73H2ATTD3300FCT-ND, Temperature Coefficient=100ppm/°C, Tolerance=1%, Voltage Rating=150V, Case Code (Imperial)=0805, ComponentLink1Description=https://www.digikey.com/product-detail/en/koa-speer-electronics-inc/RK73H2ATTD3300F/2019-RK73H2ATTD3300FCT-ND/10235463, ComponentLink1URL=https://www.digikey.com/product-detail/en/koa-speer-electronics-inc/RK73H2ATTD3300F/2019-RK73H2ATTD3300FCT-ND/10235463, ComponentLink2Description=https://br.mouser.com/ProductDetail/KOA-Speer/RK73H2ATTD3300F?qs=%2Fha2pyFadugxRkEvlrt8CF%252BQdweyO24kpRel1WKIEPxDUp0ygGBU5A%3D%3D, ComponentLink2URL=https://br.mouser.com/ProductDetail/KOA-Speer/RK73H2ATTD3300F?qs=%2Fha2pyFadugxRkEvlrt8CF%252BQdweyO24kpRel1WKIEPxDUp0ygGBU5A%3D%3D, ComponentLink3Description=http://www.koaspeer.com/catimages/Products/RK73H/RK73H.pdf?src-supplier=Mouser, ComponentLink3URL=http://www.koaspeer.com/catimages/Products/RK73H/RK73H.pdf?src-supplier=Mouser, ComponentLink4Description=http://www.farnell.com/datasheets/1832268.pdf?src-supplier=Element14, ComponentLink4URL=http://www.farnell.com/datasheets/1832268.pdf?src-supplier=Element14, Composition="Thick Film", Depth=1.25mm, Height=0.5mm, Lead Free="Lead Free", Length=2mm, Military Standard=Not, NCM=8533.21.20, Packaging="Tape and Reel", Pricing 1="1=0.1, 10=0.033, 100=0.0136, 1000=0.00612, 2500=0.00531 (USD)", Pricing 2="1=0.1, 10=0.033, 100=0.013, 1000=0.005, 5000=0.005, 10000=0.004 (USD)", REACH SVHC=Unknown, Resistance=330R, Stock 1=55895, Stock 2=0, Supplier 1=Digi-Key, Supplier 2=Mouser, Supplier Part Number 2=660-RK73H2ATTD3300F, Termination=SMD/SMT, Width=1.25mm
R2 R3 R4 R5 R7 R8 R9 R10 R11 R12 R13 R14 R15: library part R10k_1%_1/8W_0805, "RES 10K OHM 1/8W 1%  0805", Case/Package=0805, Case Code (Metric)=2012, Manufacturer=Vishay, Manufacturer Part Number=CRCW080510K0FKEA, Max Operating Temperature=155°C, Min Operating Temperature=-55°C, Package Quantity=5000, Power Rating=125mW, Resistance=10kR, Supplier Part Number 1=541-10.0KCCT-ND, Temperature Coefficient=100ppm/°C, Tolerance=1%, Voltage Rating=150V, Case Code (Imperial)=0805, ComponentLink1Description=https://www.digikey.com/product-detail/en/vishay-dale/CRCW080510K0FKEA/541-10-0KCCT-ND/1180897, ComponentLink1URL=https://www.digikey.com/product-detail/en/vishay-dale/CRCW080510K0FKEA/541-10-0KCCT-ND/1180897, ComponentLink2Description=https://br.mouser.com/ProductDetail/Vishay-Dale/CRCW080510K0FKEA?qs=sGAEpiMZZMu61qfTUdNhG2DpbjADlD3GOIdKSeOTyFU%3D, ComponentLink2URL=https://br.mouser.com/ProductDetail/Vishay-Dale/CRCW080510K0FKEA?qs=sGAEpiMZZMu61qfTUdNhG2DpbjADlD3GOIdKSeOTyFU%3D, ComponentLink3Description=http://www.mouser.com/ds/2/427/dcrcwe3-109170.pdf?src-supplier=Mouser, ComponentLink3URL=http://www.mouser.com/ds/2/427/dcrcwe3-109170.pdf?src-supplier=Mouser, ComponentLink4Description=http://uk.rs-online.com/webdocs/0d98/0900766b80d98b26.pdf?src-supplier=RSComponents, ComponentLink4URL=http://uk.rs-online.com/webdocs/0d98/0900766b80d98b26.pdf?src-supplier=RSComponents, ComponentLink5Description=http://www.alliedelec.com/m/d/0c934d6939ccefa68dbe0b96d821c8cf.pdf?src-supplier=Allied+Electronics, ComponentLink5URL=http://www.alliedelec.com/m/d/0c934d6939ccefa68dbe0b96d821c8cf.pdf?src-supplier=Allied+Electronics, ComponentLink6Description=http://www.vishay.com/docs/20035/dcrcwe3.pdf?src-supplier=Avnet+Asia, ComponentLink6URL=http://www.vishay.com/docs/20035/dcrcwe3.pdf?src-supplier=Avnet+Asia, ComponentLink7Description=http://www.vishay.com/docs/20035/dcrcwe3.pdf?src-supplier=Avnet+Europe, ComponentLink7URL=http://www.vishay.com/docs/20035/dcrcwe3.pdf?src-supplier=Avnet+Europe, ComponentLink8Description=http://www.farnell.com/datasheets/2310790.pdf?src-supplier=Element14, ComponentLink8URL=http://www.farnell.com/datasheets/2310790.pdf?src-supplier=Element14, ComponentLink9Description=http://www.vishay.com/docs/20035/dcrcwe3.pdf?src-supplier=Avnet, ComponentLink9URL=http://www.vishay.com/docs/20035/dcrcwe3.pdf?src-supplier=Avnet, ComponentLink10Description=http://www.vishay.com/docs/20035/dcrcwe3.pdf?src-supplier=Future+Electronics, ComponentLink10URL=http://www.vishay.com/docs/20035/dcrcwe3.pdf?src-supplier=Future+Electronics, Composition="Thick Film", Contact Plating=Tin, Depth=1.25mm, Height=0.45mm, Lead Free="Lead Free", Length=2mm, Military Standard=Not, NCM=8533.21.20, Packaging="Tape and Reel", Partnumber=CRCW080510K0FKEA, Pricing 1="1=0.1, 10=0.062, 100=0.0254, 1000=0.01142, 2500=0.00991 (USD)", Pricing 2="1=0.1, 10=0.062, 100=0.025, 1000=0.01, 5000=0.007, 10000=0.006 (USD)", Radiation Hardening=No, REACH SVHC=Unknown, Stock 1=1478098, Stock 2=157494, Supplier 1=Digi-Key, Supplier 2=Mouser, Supplier Part Number 2=71-CRCW0805-10K-E3, Termination=SMD/SMT, Voltage Rating (DC)=150V, Weight=0.000194oz, Width=1.25mm
R6: library part R100k_1%_1/8W_0805, "RES 100K OHM 1/8W 1% 0805", Case/Package=0805, Case Code (Metric)=2012, Manufacturer=Yageo, Manufacturer Part Number=RC0805FR-07100KL, Max Operating Temperature=155°C, Max Power Dissipation=125mW, Min Operating Temperature=-55°C, Package Quantity=1, Partnumber=AC0805FR-13100KL, Resistance=100kR, Supplier Part Number 1=311-100KCRCT-ND, Temperature Coefficient=100ppm/°C, Tolerance=1%, Voltage Rating=150V, Case Code (Imperial)=0805, ComponentLink1Description=https://www.digikey.com/product-detail/en/yageo/RC0805FR-07100KL/311-100KCRCT-ND/730491, ComponentLink1URL=https://www.digikey.com/product-detail/en/yageo/RC0805FR-07100KL/311-100KCRCT-ND/730491, ComponentLink2Description=https://br.mouser.com/ProductDetail/Yageo/RC0805FR-07100KL?qs=%2Fha2pyFadugqH4HCO4lefXR2vnSIcQedeLFD%252BIWbuSwm%252BtiKkObUBg%3D%3D, ComponentLink2URL=https://br.mouser.com/ProductDetail/Yageo/RC0805FR-07100KL?qs=%2Fha2pyFadugqH4HCO4lefXR2vnSIcQedeLFD%252BIWbuSwm%252BtiKkObUBg%3D%3D, ComponentLink3Description=http://www.yageo.com/documents/recent/PYu-RC_Group_51_RoHS_L_10.pdf?src-supplier=Digi-Key, ComponentLink3URL=http://www.yageo.com/documents/recent/PYu-RC_Group_51_RoHS_L_10.pdf?src-supplier=Digi-Key, ComponentLink4Description=http://www.yageo.com/documents/recent/PYu-RC_Group_51_RoHS_L_9.pdf?src-supplier=Mouser, ComponentLink4URL=http://www.yageo.com/documents/recent/PYu-RC_Group_51_RoHS_L_9.pdf?src-supplier=Mouser, ComponentLink5Description=http://documents.rs-components.com/techlib://itc_doclist_GB.htm?stockno=6185113&src-supplier=RSComponents, ComponentLink5URL=http://documents.rs-components.com/techlib://itc_doclist_GB.htm?stockno=6185113&src-supplier=RSComponents, ComponentLink6Description=http://www.yageo.ru/pdf/RC0805.pdf?src-supplier=Future+Electronics, ComponentLink6URL=http://www.yageo.ru/pdf/RC0805.pdf?src-supplier=Future+Electronics, ComponentLink7Description=http://www.farnell.com/datasheets/38627.pdf?src-supplier=Element14, ComponentLink7URL=http://www.farnell.com/datasheets/38627.pdf?src-supplier=Element14, ComponentLink8Description=http://www.farnell.com/datasheets/2167052.pdf?src-supplier=Element14, ComponentLink8URL=http://www.farnell.com/datasheets/2167052.pdf?src-supplier=Element14, ComponentLink9Description=http://www.farnell.com/datasheets/1686128.pdf?src-supplier=Element14, ComponentLink9URL=http://www.farnell.com/datasheets/1686128.pdf?src-supplier=Element14, ComponentLink10Description=http://www.farnell.com/datasheets/444164.pdf?src-supplier=Element14, ComponentLink10URL=http://www.farnell.com/datasheets/444164.pdf?src-supplier=Element14, Composition="Thick Film", Depth=1.25mm, Features="Moisture Resistant", Height=0.024inch, Lead Free="Lead Free", Lead Pitch=0.4mm, Length=2mm, Military Standard=Not, NCM=8533.21.20, Number of Pins=2, Number of Terminations=2, Packaging="Tape and Reel", Power Rating=125mW, Pricing 1="1=0.1, 10=0.04, 100=0.0163, 1000=0.00731, 2500=0.00635 (USD)", Pricing 2="1=0.13, 10=0.031, 100=0.011, 1000=0.008, 5000=0.005, 10000=0.005 (USD)", REACH SVHC=Unknown, Stock 1=5685931, Stock 2=2067874, Supplier 1=Digi-Key, Supplier 2=Mouser, Supplier Part Number 2=603-RC0805FR-07100KL, Termination=SMD/SMT, Voltage Rating (DC)=150V, Width=0.049inch
SC1: library part 503182-1852, "MOLEX - 503182-1852 - Micro SD Normal UltraLowPro8CktEmbsTpPkg RoHS Compliant: Yes", Manufacturer=Molex, Max Operating Temperature=85°C, Min Operating Temperature=-25°C, Package Quantity=1600, Supplier Part Number 1=WM12834CT-ND, ComponentLink1Description=https://www.molex.com/pdm_docs/sd/5031821852_sd.pdf?src-supplier=Digi-Key, ComponentLink1URL=https://www.molex.com/pdm_docs/sd/5031821852_sd.pdf?src-supplier=Digi-Key, ComponentLink2Description=http://www.farnell.com/datasheets/2701359.pdf?src-supplier=Element14, ComponentLink2URL=http://www.farnell.com/datasheets/2701359.pdf?src-supplier=Element14, ComponentLink3Description=http://www.farnell.com/datasheets/2701359.pdf?src-supplier=Farnell, ComponentLink3URL=http://www.farnell.com/datasheets/2701359.pdf?src-supplier=Farnell, ComponentLink4Description=http://www.molex.com/pdm_docs/sd/5031821852_sd.pdf?src-supplier=Digi-Key, ComponentLink4URL=http://www.molex.com/pdm_docs/sd/5031821852_sd.pdf?src-supplier=Digi-Key, ComponentLink5Description=http://components.arrow.com/part/dataview/0323_07103516?src-supplier=Arrow+Europe, ComponentLink5URL=http://components.arrow.com/part/dataview/0323_07103516?src-supplier=Arrow+Europe, ComponentLink6Description=http://www.farnell.com/datasheets/2701359.pdf?src-supplier=Newark, ComponentLink6URL=http://www.farnell.com/datasheets/2701359.pdf?src-supplier=Newark, Connector Type=Connector, Contact Material="Copper Alloy", Contact Plating=Gold, Depth=14.95mm, Gender=Male, Halogen Free="Low Halogen", Housing Material=Polymer, Length=15.2mm, Manufacturer Part Number=503182-1852, Mount="Surface Mount", Number of Circuits=8, Number of Rows=1, Orientation="Right Angle", Packaging="Tape and Reel", Pitch=1.1mm, Pricing 1="1=2.45, 10=2.224, 25=2.0884, 50=1.9974, 100=1.9067, 250=1.72508, 500=1.5889 (USD)", Pricing 2="1=2.22, 10=1.81, 100=1.56, 500=1.44, 1000=1.23, 1600=1.15, 4800=1.07, 9600=1.03, 24000=1 (USD)", REACH SVHC="No SVHC", Stock 1=15724, Stock 2=10562, Supplier 1=Digi-Key, Supplier 2=Mouser, Supplier Part Number 2=538-503182-1852, Termination=Solder
TP1 TP2 TP3 TP4 TP5 TP6 TP7 TP8 TP9: "Test point"
U1: library part "MT25QL01GBBB8ESF-0SIT (2)", "NOR Flash Serial-SPI 3V 1Gbit 1024M/512M/256M x 1bit/2bit/4bit 6ns 16-Pin SOP-II", Case/Package=SOP, Manufacturer="Micron Technology", Max Operating Temperature=85°C, Max Supply Voltage=3.6V, Min Operating Temperature=-40°C, Min Supply Voltage=2.7V, Operating Supply Voltage=3V, Supplier Part Number 1=557-1789-ND, Access Time=6ns, ComponentLink1Description=https://www.micron.com/~/media/documents/products/data-sheet/nor-flash/serial-nor/mt25q/die-rev-b/mt25q_qlkt_l_01g_bbb_0.pdf?src-supplier=Digi-Key, ComponentLink1URL=https://www.micron.com/~/media/documents/products/data-sheet/nor-flash/serial-nor/mt25q/die-rev-b/mt25q_qlkt_l_01g_bbb_0.pdf?src-supplier=Digi-Key, ComponentLink2Description=http://www.micron.com/~/media/documents/products/data-sheet/nor-flash/serial-nor/mt25q/mt25q_qlkt_l_01g_bbb_0.pdf?src-supplier=Avnet+Asia, ComponentLink2URL=http://www.micron.com/~/media/documents/products/data-sheet/nor-flash/serial-nor/mt25q/mt25q_qlkt_l_01g_bbb_0.pdf?src-supplier=Avnet+Asia, Contact Plating=Tin,Matte, Density=1Gb, Interface=SPI,Serial, Manufacturer Part Number=MT25QL01GBBB8ESF-0SIT, Memory Type=NOR, Mount="Surface Mount", Number of Pins=16, Page Size=256B, Pricing 1="1=10.53, 10=9.755, 25=9.534, 50=9.4818, 100=8.3474, 250=7.9344, 500=7.85296, 1000=7.59119 (USD)", Pricing 2="1=12, 10=11.04, 25=10.81, 50=10.77, 100=9.67, 250=9.37, 500=8.91, 1000=8.6, 2000=7.97 (USD)", Stock 1=1351, Stock 2=2389, Supplier 1=Digi-Key, Supplier 2=Mouser, Supplier Part Number 2=340-278808-TRAY
U2: "IC BUF NON-INVERT 3.6V 14TSSOP", Case/Package=TSSOP, High Level Output Current=-24mA, Low Level Output Current=24mA, Manufacturer="Texas Instruments", Max Operating Temperature=125°C, Max Power Dissipation=500mW, Max Supply Voltage=3.6V, Min Operating Temperature=-40°C, Min Supply Voltage=1.65V, Package Quantity=1, Quiescent Current=1uA, Supplier Part Number 1=296-1222-1-ND, ComponentLink1Description=https://www.digikey.com/product-detail/en/texas-instruments/SN74LVC125APWR/296-1222-1-ND/276490, ComponentLink1URL=https://www.digikey.com/product-detail/en/texas-instruments/SN74LVC125APWR/296-1222-1-ND/276490, ComponentLink2Description=https://br.mouser.com/ProductDetail/Texas-Instruments/SN74LVC125APWR?qs=sGAEpiMZZMuiiWkaIwCK2SeqB8b8eM7HVlo3jiw3ikc%3D, ComponentLink2URL=https://br.mouser.com/ProductDetail/Texas-Instruments/SN74LVC125APWR?qs=sGAEpiMZZMuiiWkaIwCK2SeqB8b8eM7HVlo3jiw3ikc%3D, ComponentLink3Description=http://www.ti.com/lit/ds/symlink/sn74lvc125a.pdf?src-supplier=Digi-Key, ComponentLink3URL=http://www.ti.com/lit/ds/symlink/sn74lvc125a.pdf?src-supplier=Digi-Key, ComponentLink4Description=http://www.ti.com/general/docs/lit/getliterature.tsp?genericPartNumber=SN74LVC125A&&fileType=pdf&src-supplier=Avnet, ComponentLink4URL=http://www.ti.com/general/docs/lit/getliterature.tsp?genericPartNumber=SN74LVC125A&&fileType=pdf&src-supplier=Avnet, ComponentLink5Description=http://www.farnell.com/datasheets/1764352.pdf?src-supplier=Element14, ComponentLink5URL=http://www.farnell.com/datasheets/1764352.pdf?src-supplier=Element14, ComponentLink6Description=http://www.produktinfo.conrad.com/datenblaetter/1000000-1099999/001017107-da-01-en-IC_BUS_BUF_Q_SN74LVC125APWR_TSSOP_14_TID.pdf?src-supplier=Conrad, ComponentLink6URL=http://www.produktinfo.conrad.com/datenblaetter/1000000-1099999/001017107-da-01-en-IC_BUS_BUF_Q_SN74LVC125APWR_TSSOP_14_TID.pdf?src-supplier=Conrad, Contact Plating=Gold, Height=1.15mm, Lead Free="Lead Free", Length=5mm, Logic Function=Buffer,Inverting, Manufacturer Part Number=SN74LVC125APWR, Mount="Surface Mount", Number of Bits=4, Number of Bits per Element=1, Number of Channels=4, Number of Circuits=4, Number of Elements=4, Number of Gates=4, Number of Input Lines=4, Number of Inputs=4, Number of Output Lines=3, Number of Outputs=4, Number of Pins=14, Packaging="Tape and Reel", Polarity=Non-Inverting, Pricing 1="1=0.35, 10=0.282, 25=0.258, 100=0.192, 250=0.174, 500=0.144, 1000=0.108 (USD)", Pricing 2="1=0.34, 10=0.265, 100=0.143, 1000=0.107, 2000=0.092, 10000=0.086 (USD)", Propagation Delay=4.6ns, Radiation Hardening=No, REACH SVHC="No SVHC", Stock 1=51249, Stock 2=22689, Supplier 1=Digi-Key, Supplier 2=Mouser, Supplier Part Number 2=595-SN74LVC125APWR, Termination=SMD/SMT, Turn-On Delay Time=5.3ns, Width=4.4mm

## Via types
v1: diameter 0.508, hole 0.254, Top Layer to Bottom Layer, tented both sides, 49 vias

## Nets (pads, with @x,y where several pads share a name; then routed paths per layer and width w, separated by ;. In a path a pad name is that pad's centre, name@x,y a point inside that pad or via, vN(x,y) a via of type N, cw(c..) or ccw(c..) an arc to the next point about the centre after c; other vN are vias at no path point)
"ANTENNA VCC": P1.3
"BATTERY VCC": P1.5
CLK_EN: R13.1 TP7.1 U2.1 | length 24.8
  Top Layer w0.254: v1(8.675,13.5) 8.675,13.46 9.675,12.46 U2.1@9.715,12.46 ; U2.1 11.44,12.46 v1(12.775,11.125) ; v1(23.475,11.8) 23.525,11.85 R13.1
  Bottom Layer w0.254: TP7.1 2.595,14.318 7.857,14.318 v1(8.675,13.5) ; v1(12.775,11.125) 22.8,11.125 v1(23.475,11.8)
"D BOARD ADC0": P1.12
"D BOARD ADC1": P1.14
"D BOARD ADC2": P1.16
"D BOARD GPIO0": P1.7 R5.1 TP4.1 U1.3 | length 53.4
  Top Layer w0.254: v1(13.3,19.125) 27.865,19.125 28.809,20.069 28.925,19.953 v1(28.925,18.25) ; U1.3 44.676,11.805 46.475,13.604 v1(46.475,17.475)
  Bottom Layer w0.254: TP4.1 3.088,20.225 P1.7 ; P1.7@11.145,20.225 11.535,19.835 11.8,19.835 12.51,19.125 v1(13.3,19.125) ; v1(28.925,18.25) 45.7,18.25 v1(46.475,17.475)
"D BOARD GPIO1": P1.8 R4.1 TP3.1 U1.1 | length 59.5
  Top Layer w0.254: v1(26.7,15.75) 28.286,15.75 R4.1@28.734,15.302 ; v1(43.95,15.725) 43.95,14.458 U1.1
  Bottom Layer w0.254: TP3.1 4.209,15.016 4.35,15.016 25.966,15.016 v1(26.7,15.75) 22.225,20.225 P1.8 ; v1@26.7,15.725 26.713,15.737 43.937,15.737 v1(43.95,15.725)
"D BOARD GPIO2": P1.9 R3.1 TP2.1 U1.9 | length 67.8
  Top Layer w0.254: v1(12.375,20.35) 26.434,20.35 28.809,22.725 R3.1 28.925,23.003 v1(28.925,24.6) ; v1(48.8,18.5) 48.8,9.529 52.874,5.455 U1.9
  Bottom Layer w0.254: TP2.1 2.625,21.225 P1.9 11.145,21.225 11.535,20.835 11.89,20.835 v1(12.375,20.35) ; v1(28.925,24.6) 42.7,24.6 v1(48.8,18.5)
"D BOARD GPIO3": P1.10 R1.1 | length 23.6
  Top Layer w0.254: v1(13.3,21.175) 12.025,21.175 10.85,22.35 10.85,31.447 17.341,37.938 R1.1
  Bottom Layer w0.254: v1(13.3,21.175) 13.325,21.2 15.525,21.2 P1.10
"D BOARD SPI CS0": J_V3.2 P1.17 TP6.1 | length 15.9
  Top Layer w0.254: v1(12.375,24.95) 11.55,25.775 11.55,27.616 J_V3.2
  Bottom Layer w0.254: TP6.1 3.463,25.225 P1.17 12.1,25.225 v1(12.375,24.95)
"D BOARD SPI CS1": J_V2.2 P1.19 R2.1 TP1.1 | length 52
  Top Layer w0.254: v1(26.1,28.075) 28.734,28.075 28.734,28.063 34.997,21.8 34.997,8.537 J_V2.2
  Bottom Layer w0.254: TP1.1 2.225,26.25 9.925,26.25 P1.19 11.145,26.225 12.995,28.075 v1(26.1,28.075)
GND: C1.2 C2.2 C3.2 D1.2 M4.0 P1.2 P1.4 P1.6 P4.2 R6.2 R13.2 R14.2 R15.2 SC1.6 SC1.10 U1.10 U2.7 U2.12 | length 0.9
  Bottom Layer w0.254: P1.6 P1.6@16.412,19.225
  other v1: 19.964,16.866 26.775,17.7 37.694,20.295 53.909,24.459 46.083,24.85 38.875,27.05
"I2C2 SCL BUF": P1.20
"I2C2 SDA BUF": P1.18
MISO_EN: R15.1 TP9.1 U2.10 | length 25
  Top Layer w0.254: v1(12.162,6.825) 13.8,6.825 14.355,7.38 U2.10 16.095,7.38 19,4.475 R15.1
  Bottom Layer w0.254: TP9.1 11.212,7.775 v1(12.162,6.825)
MOSI_EN: R14.1 TP8.1 U2.4 | length 24
  Top Layer w0.254: v1(8.457,10.018) 8.506,9.969 8.506,9.819 U2.4@9.675,8.65 ; U2.4 v1(12.8,8.65) ; v1(23.45,7) 25.334,7 R14.1
  Bottom Layer w0.254: TP8.1@2.275,10.018 v1(8.457,10.018) ; v1(12.8,8.65) 21.8,8.65 v1(23.45,7)
NetD1_1: D1.1 R1.2 | length 2.7
  Top Layer w0.254: D1.1@15.15,40.725 15.309,40.566 R1.2
NetJ_V1_1: J_V1.1 P4.1 | length 9.4
  Top Layer w0.254: J_V1.1 6.883,32.263 P4.1
NetJ_V2_1: J_V2.1 U1.7 | length 5.2
  Top Layer w0.254: J_V2.1 U1.7
NetJ_V3_1: J_V3.1 R11.1 SC1.2 | length 49.6
  Top Layer w0.254: J_V3.1 v1(16.55,29.1) ; R11.1 44.723,22.366 44.35,22.739 44.35,28.65 v1(45.625,29.925) 46.75,31.05 SC1.2
  Bottom Layer w0.254: v1(16.55,29.1) 44.8,29.1 v1(45.625,29.925)
NetR7_1: R7.1 SC1.8 | length 19.2
  Top Layer w0.254: SC1.8 53.623,39.505 53.623,32.478 56.21,29.89 56.21,23.514 55.062,22.366 R7.1
NetR12_1: R12.1 SC1.1 | length 18.8
  Top Layer w0.254: R12.1 42.7,22.716 42.7,33.25 45.65,36.2 SC1.1
"OBDH 3V3DVCC": C1.1 C2.1 C3.1 J_V1.2 P1.1 R2.2 R3.2 R4.2 R5.2 R7.2 R8.2 R9.2 R10.2 R11.2 R12.2 SC1.4 U1.2 U2.13 U2.14 | length 155.3
  Top Layer w0.508: v1(9.83,31.275) 8.915,30.361 J_V1.2 8.915,16.585 v1(9.925,15.575) 13.04,12.46 U2.14 ; U2.13 U2.14 ; R3.2 R5.2 30.841,15.775 R4.2 30.791,15.036 29.733,13.978 20.685,13.978 19.05,12.343 C3.1 18.833,12.46 U2.14 ; R2.2 30.841,27.988 31.001,28.148 34.027,28.148 41.841,20.334 40.575,19.068 C2.1 ; C1.1 38.321,12.89 40.372,12.89 C2.1 ; R12.2@42.188,20.334 R12.2 R11.2 R10.2 R9.2 R8.2 R7.2 54.941,20.375 v1(56.675,20.375) ; U1.2 44.054,13.084 40.584,13.084 C2.1 ; v1@48.95,31.275 SC1.4
  Bottom Layer w0.254: P1.1@9.925,17.2 P1.1
  Bottom Layer w0.508: v1@9.9,31.275 v1(48.923,31.275) 49.325,31.275 56.675,23.925 v1(56.675,20.375) ; v1(9.925,15.575) P1.1@9.925,17.2
SPI_B\U\F\F\_CLK: P1.11 P2.1 U2.2 | length 39.5
  Top Layer w0.254: v1(7.1,22.23) 7.1,13.765 9.675,11.19 U2.2 ; v1(12.275,22.289) 14.779,22.289 26.615,34.125 P2.1
  Bottom Layer w0.254: v1@7.105,22.225 7.107,22.227 9.948,22.227 P1.11 9.982,22.257 12.243,22.257 v1(12.275,22.289)
SPI_B\U\F\F\_MISO: P1.13 P2.2 U2.9 | length 49.8
  Top Layer w0.254: v1(6.2,8.75) v1(6.2,23.225) ; v1(13.275,23.3) 24.075,34.1 P2.2 ; v1(13.85,6.05) 15.49,6.05 U2.9
  Bottom Layer w0.254: v1(6.2,8.75) 11.15,8.75 v1(13.85,6.05) ; v1(6.2,23.225) P1.13 9.988,23.262 13.237,23.262 v1(13.275,23.3)
SPI_B\U\F\F\_MOSI: P1.15 P2.3 U2.5 | length 44.9
  Top Layer w0.254: v1(5.2,24.175) 5.2,8.38 6.2,7.38 U2.5 ; v1(12.4,23.9) 21.535,33.035 P2.3
  Bottom Layer w0.254: v1@5.25,24.225 5.275,24.2 9.925,24.2 P1.15 12.006,24.225 12.331,23.9 v1(12.4,23.9)
SPI_BUFF_CLK: P3.1 R6.1 R10.1 SC1.3 TP5.1 U1.16 U2.3 | length 144.6
  Top Layer w0.254: v1(7.5,11.925) 7.549,11.876 7.719,11.876 9.675,9.92 U2.3 v1(12.795,9.92) ; v1(23.475,9.35) R6.1@25.434,9.35 ; R10.1 47.377,22.366 47.85,22.839 SC1.3 SC1.3@47.875,39.802 ; U1.16 53.532,14.3 v1(55.775,14.3)
  Bottom Layer w0.254: TP5.1 2.675,11.925 v1(7.5,11.925) 8.125,12.55 34.825,12.55 41.85,5.525 47.425,5.525 55.775,13.875 v1(55.775,14.3) 60.375,18.9 60.375,30.725 54.6,36.5 v1(47.85,36.5) 36.34,36.5 P3.1 ; v1(12.795,9.92) 22.905,9.92 v1(23.475,9.35)
SPI_BUFF_MISO: P3.2 R8.1 SC1.7 U1.8 U2.8 | length 105.9
  Top Layer w0.254: U2.8 16.025,4.84 17.457,3.408 41.404,3.408 43.45,5.455 U1.8 45.93,5.455 48.675,8.2 v1(48.675,8.25) ; SC1.7@52.225,39.803 SC1.7 52.25,22.506 R8.1
  Bottom Layer w0.254: P3.2 35.3,35 v1(52.275,35) 58.575,28.7 58.575,18.1 48.725,8.25 v1(48.675,8.25)
SPI_BUFF_MOSI: P3.3 R9.1 SC1.5 U1.15 U2.6 | length 125.6
  Top Layer w0.254: U2.6 11.265,6.11 11.925,5.45 v1(12.62,5.45) ; R9.1 50.05,22.536 SC1.5 SC1.5@50.075,39.802 ; v1(51,13) 53.412,13 53.45,13.037 53.487,13 53.487,12.95 53.536,12.999 56.376,12.999 v1(56.425,12.95)
  Bottom Layer w0.254: v1(12.62,5.45) 14.32,3.75 54.675,3.75 56.425,5.5 v1(56.425,12.95) ; P3.3 33.96,33.8 v1(50.05,33.8) 57.575,26.275 57.575,18.8 51.775,13 v1(51,13)
pads on no net: FD1.1 FD2.1 FD3.1 M1.0 M2.0 M3.0 P1.AT U1.4 U1.5 U1.6 U1.11 U1.12 U1.13 U1.14 U2.11

## Polygon pours and split planes (outlines as drawn)
no net on Mechanical 1 (solid): 3,42.175